# EAGLE board stm32f4-discovery-breakout-v2 (EAGLE 7.1.0)
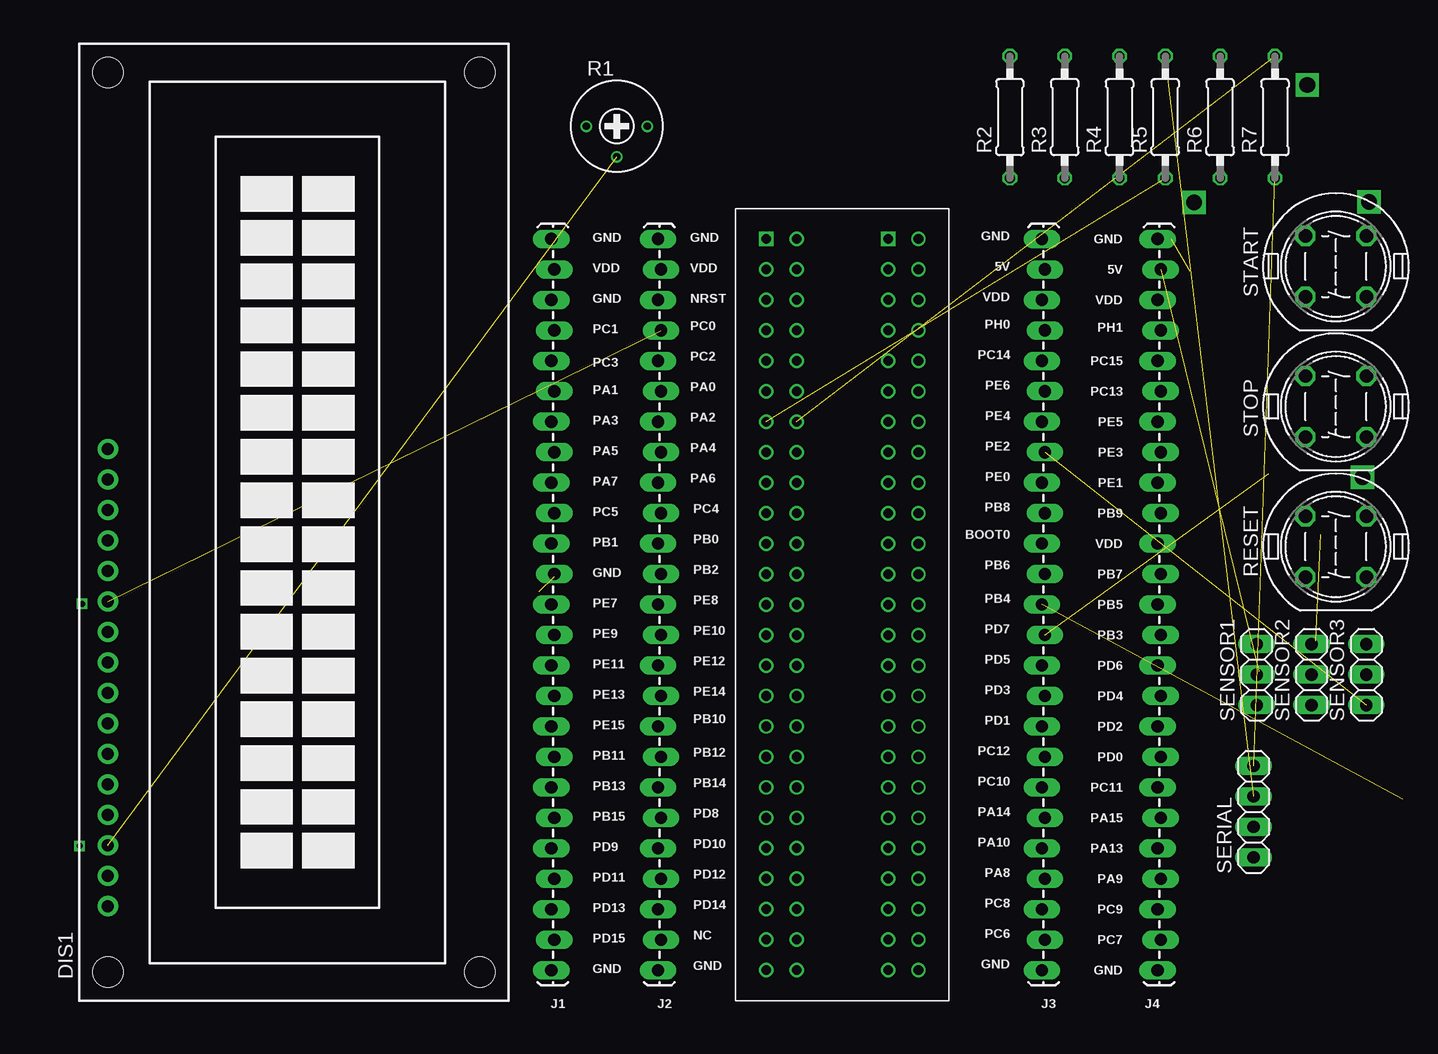
[diagram p0: board, top side]
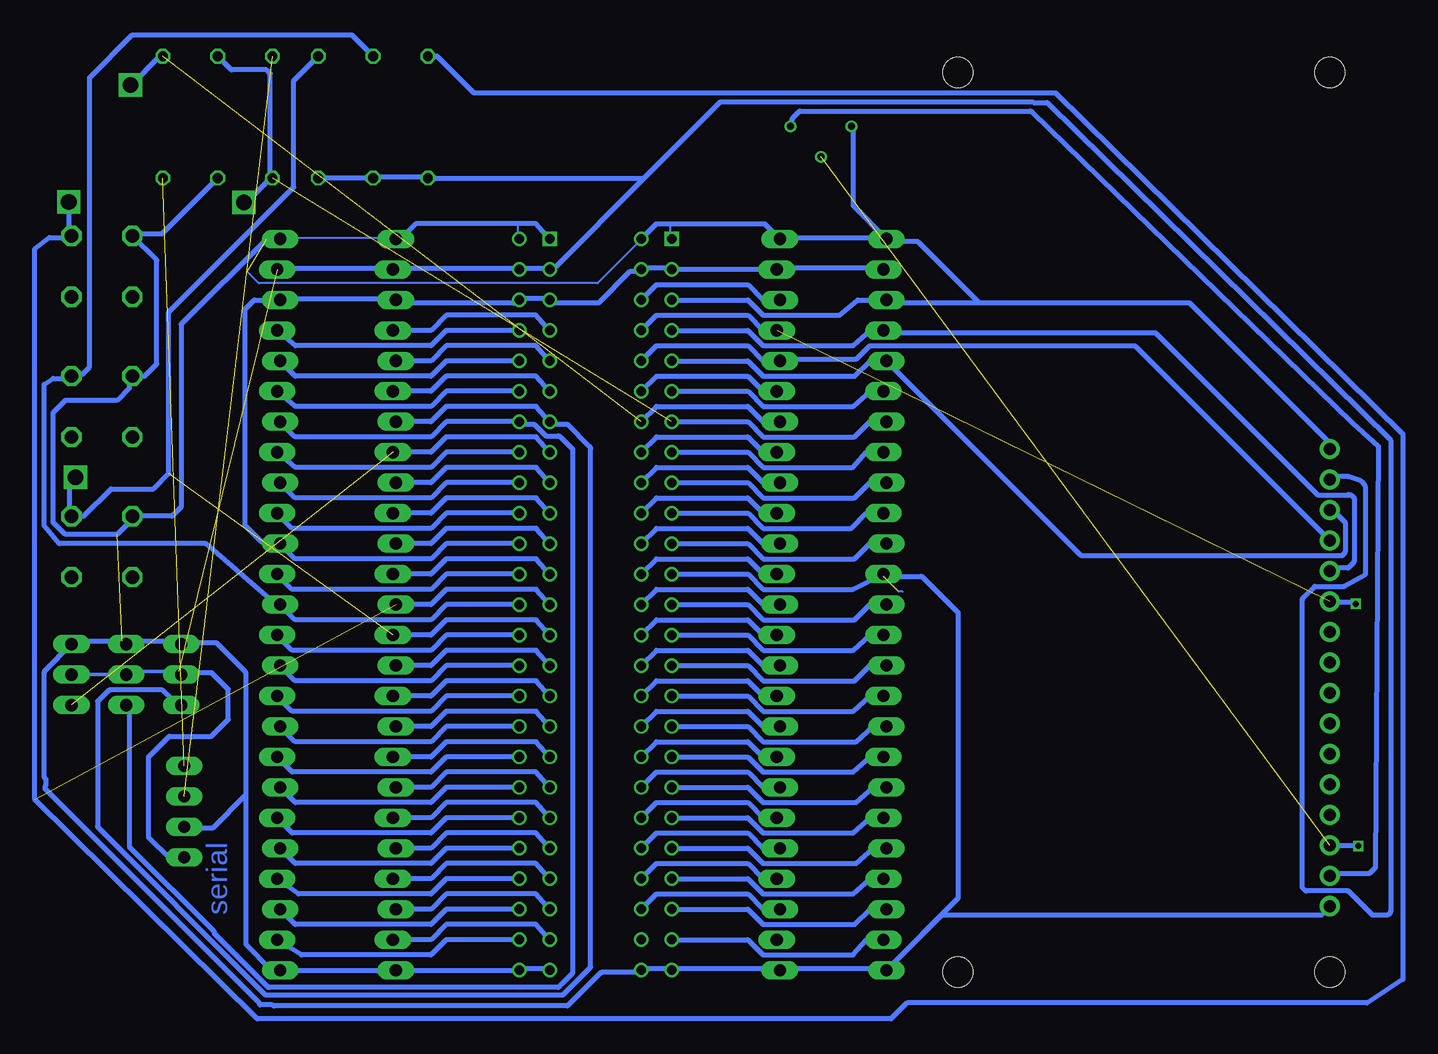
[diagram p1: board, bottom side, seen from below]

No outline drawn. Coordinates in mm, seen from the top.
Copper layers (1*16): Top 0.0356mm / dielectric 1.5011mm / Bottom 0.0356mm
Design rules "LaenPCBOrder": minimum track width 6mil, minimum drill 13mil, track to track 6mil, track to pad 6mil, pad to pad 6mil, via to via 6mil, smd to smd 6mil, copper to edge 15mil, drill to drill 6mil, minimum pad ring 7mil, minimum via ring 7mil, stop-mask expansion 3mil, vias tented up to drill 0mil, thermal gap 10mil

## Footprints (pad centres in the part's own frame; a part is rotated, then mirrored left to right if it is on the bottom)
TUXGR_16X2_R2 = drill 1 pad 1.676: 1 -32,15.5; 2 -29.46,15.5; 3 -26.92,15.5; 4 -24.38,15.5; 5 -21.84,15.5; 6 -19.3,15.5; 7 -16.76,15.5; 8 -14.22,15.5; 9 -11.68,15.5; 10 -9.14,15.5; 11 -6.6,15.5; 12 -4.06,15.5; 13 -1.52,15.5; 14 1.02,15.5; 15 3.56,15.5; 16 6.1,15.5 | hole 2.5: -37.5,-15.5; 37.5,-15.5; -37.5,15.5; 37.5,15.5
1X25_LOCK_LONGPADS = drill 1.016 long: 1 0,0.127; 2 2.54,-0.127; 3 5.08,0.127; 4 7.62,-0.127; 5 10.16,0.127; 6 12.7,-0.127; 7 15.24,0.127; 8 17.78,-0.127; 9 20.32,0.127; 10 22.86,-0.127; 11 25.4,0.127; 12 27.94,-0.127; 13 30.48,0.127; 14 33.02,-0.127; 15 35.56,0.127; 16 38.1,-0.127; 17 40.64,0.127; 18 43.18,-0.127; 19 45.72,0.127; 20 48.26,-0.127; 21 50.8,0.127; 22 53.34,-0.127; 23 55.88,0.127; 24 58.42,-0.127; 25 60.96,0.127
RTRIM3339P = drill 0.61: 1 -2.54,0; 2 0,-2.54; 3 2.54,0
0207/10 = drill 0.813 octagon: 1 -5.08,0; 2 5.08,0
DT6 = drill 1.118 octagon: 1 -2.54,2.54; 2 2.54,2.54; 3 2.54,-2.54; 4 -2.54,-2.54
1X03 = drill 1.016 long: 1 -2.54,0; 2 0,0; 3 2.54,0
1X04 = drill 1.016 long: 1 -3.81,0; 2 -1.27,0; 3 1.27,0; 4 3.81,0
STM32F4-DISCOVERY = drill 0.8 square: P$1 -27.94,30.48; P$51 -17.78,30.48 | drill 0.8: P$2 -25.4,30.48; P$3 -27.94,27.94; P$4 -25.4,27.94; P$5 -27.94,25.4; P$6 -25.4,25.4; P$7 -27.94,22.86; P$8 -25.4,22.86; P$9 -27.94,20.32; P$10 -25.4,20.32; P$11 -27.94,17.78; P$12 -25.4,17.78; P$13 -27.94,15.24; P$14 -25.4,15.24; P$15 -27.94,12.7; P$16 -25.4,12.7; P$17 -27.94,10.16; P$18 -25.4,10.16; P$19 -27.94,7.62; P$20 -25.4,7.62; P$21 -27.94,5.08; P$22 -25.4,5.08; P$23 -27.94,2.54; P$24 -25.4,2.54; P$25 -27.94,0; P$26 -25.4,0; P$27 -27.94,-2.54; P$28 -25.4,-2.54; P$29 -27.94,-5.08; P$30 -25.4,-5.08; P$31 -27.94,-7.62; P$32 -25.4,-7.62; P$33 -27.94,-10.16; P$34 -25.4,-10.16; P$35 -27.94,-12.7; P$36 -25.4,-12.7; P$37 -27.94,-15.24; P$38 -25.4,-15.24; P$39 -27.94,-17.78; P$40 -25.4,-17.78; P$41 -27.94,-20.32; P$42 -25.4,-20.32; P$43 -27.94,-22.86; P$44 -25.4,-22.86; P$45 -27.94,-25.4; P$46 -25.4,-25.4; P$47 -27.94,-27.94; P$48 -25.4,-27.94; P$49 -27.94,-30.48; P$50 -25.4,-30.48; P$52 -15.24,30.48; P$53 -17.78,27.94; P$54 -15.24,27.94; P$55 -17.78,25.4; P$56 -15.24,25.4; P$57 -17.78,22.86; P$58 -15.24,22.86; P$59 -17.78,20.32; P$60 -15.24,20.32; P$61 -17.78,17.78; P$62 -15.24,17.78; P$63 -17.78,15.24; P$64 -15.24,15.24; P$65 -17.78,12.7; P$66 -15.24,12.7; P$67 -17.78,10.16; P$68 -15.24,10.16; P$69 -17.78,7.62; P$70 -15.24,7.62; P$71 -17.78,5.08; P$72 -15.24,5.08; P$73 -17.78,2.54; P$74 -15.24,2.54; P$75 -17.78,0; P$76 -15.24,0; P$77 -17.78,-2.54; P$78 -15.24,-2.54; P$79 -17.78,-5.08; P$80 -15.24,-5.08; P$81 -17.78,-7.62; P$82 -15.24,-7.62; P$83 -17.78,-10.16; P$84 -15.24,-10.16; P$85 -17.78,-12.7; P$86 -15.24,-12.7; P$87 -17.78,-15.24; P$88 -15.24,-15.24; P$89 -17.78,-17.78; P$90 -15.24,-17.78; P$91 -17.78,-20.32; P$92 -15.24,-20.32; P$93 -17.78,-22.86; P$94 -15.24,-22.86; P$95 -17.78,-25.4; P$96 -15.24,-25.4; P$97 -17.78,-27.94; P$98 -15.24,-27.94; P$99 -17.78,-30.48; P$100 -15.24,-30.48

## Placement (x,y rotation side)
DIS1  TUXGR_16X2_R2  [TUXGR_16X2_R2]  -17.27,41.66 90 top
J1  [1X25_LOCK_LONGPADS]  4.32,4.32 90 top
J2  [1X25_LOCK_LONGPADS]  13.21,4.32 90 top
J3  [1X25_LOCK_LONGPADS]  45.21,4.32 90 top
J4  [1X25_LOCK_LONGPADS]  54.86,4.32 90 top
R1  [RTRIM3339P]  9.65,74.68 0 top
R2  [0207/10]  42.42,75.44 90 top
R3  [0207/10]  46.99,75.44 90 top
R4  [0207/10]  51.56,75.44 90 top
R5  [0207/10]  55.37,75.44 90 top
R6  [0207/10]  59.94,75.44 90 top
R7  [0207/10]  64.52,75.44 90 top
RESET  DT6  [DT6]  69.6,39.62 90 top
SENSOR1  [1X03]  62.99,28.96 90 top
SENSOR2  [1X03]  67.56,28.96 90 top
SENSOR3  [1X03]  72.14,28.96 90 top
SERIAL  [1X04]  62.74,17.53 90 top
START  DT6  [DT6]  69.6,62.99 90 top
STOP  DT6  [DT6]  69.6,51.31 90 top
U$1  STM32F4-DISCOVERY  [STM32F4-DISCOVERY]  50.04,34.8 0 top

## Library data of the parts
DIS1 = display-lcd; OC_FARNELL: unknown; OC_NEWARK: unknown
J1-J4 = SparkFun-Connectors
R1 = resistor
R2-R7 = rcl
RESET START STOP = switch-misc
SENSOR1-SENSOR3 SERIAL = pinhead
U$1 = STM32F4-DISCOVERY

## Nets
5V: DIS1.15 J3.24 J4.24 R2.1 R3.1 R4.1 SENSOR1.2 SENSOR2.2 SENSOR3.2 U$1.P$53 U$1.P$54
BOOT0: J3.15 U$1.P$71
GND: DIS1.1 DIS1.16 J1.1 J1.14 J1.23 J1.25 J2.1 J2.25 J3.1 J3.25 J4.1 J4.25 R1.1 R6.1 RESET.2 SENSOR1.3 SENSOR2.3 SENSOR3.3 START.2 STOP.2 U$1.P$1 U$1.P$2 U$1.P$5 U$1.P$23 U$1.P$49 U$1.P$50 U$1.P$51 U$1.P$52 U$1.P$99 U$1.P$100
N$1: DIS1.2 R1.3
N$2: DIS1.3 R1.2
N$3: SERIAL.1
N$4: SERIAL.2
N$5: R5.2 SERIAL.3
N$7: R7.1 SERIAL.4
NRST: J2.23 U$1.P$6
PA0: J2.20 U$1.P$12
PA1: J1.20 U$1.P$11
PA2: J2.19 R7.2 U$1.P$14
PA3: J1.19 R5.1 R6.2 U$1.P$13
PA4: J2.18 U$1.P$16
PA5: J1.18 U$1.P$15
PA6: J2.17 U$1.P$18
PA7: J1.17 U$1.P$17
PA8: J3.4 U$1.P$93
PA9: J4.4 U$1.P$94
PA10: J3.5 U$1.P$91
PA13: J4.5 U$1.P$92
PA14: J3.6 U$1.P$89
PA15: J4.6 U$1.P$90
PB0: J2.15 U$1.P$22
PB1: J1.15 U$1.P$21
PB2: J2.14 U$1.P$24
PB3: J4.12 U$1.P$78
PB4: J3.13 R2.2 START.3 U$1.P$75
PB5: J4.13 R3.2 STOP.3 U$1.P$76
PB6: J3.14 U$1.P$73
PB7: J4.14 U$1.P$74
PB8: J3.16 U$1.P$69
PB9: J4.16 U$1.P$70
PB10: J2.9 U$1.P$34
PB11: J1.8 U$1.P$35
PB12: J2.8 U$1.P$36
PB13: J1.7 U$1.P$37
PB14: J2.7 U$1.P$38
PB15: J1.6 U$1.P$39
PC0: DIS1.11 J2.22 U$1.P$8
PC1: DIS1.12 J1.22 U$1.P$7
PC2: DIS1.13 J2.21 U$1.P$10
PC3: DIS1.14 J1.21 U$1.P$9
PC4: J2.16 U$1.P$20
PC5: J1.16 U$1.P$19
PC6: J3.2 U$1.P$97
PC7: J4.2 U$1.P$98
PC8: J3.3 U$1.P$95
PC9: J4.3 U$1.P$96
PC10: J3.7 U$1.P$87
PC11: J4.7 U$1.P$88
PC12: J3.8 U$1.P$85
PC13: J4.20 U$1.P$62
PC14: J3.21 U$1.P$59
PC15: J4.21 U$1.P$60
PD0: J4.8 U$1.P$86
PD1: J3.9 U$1.P$83
PD2: J4.9 U$1.P$84
PD3: J3.10 U$1.P$81
PD4: J4.10 U$1.P$82
PD5: J3.11 U$1.P$79
PD6: J4.11 U$1.P$80
PD7: J3.12 R4.2 RESET.3 U$1.P$77
PD8: J2.6 U$1.P$40
PD9: J1.5 U$1.P$41
PD10: J2.5 U$1.P$42
PD11: J1.4 U$1.P$43
PD12: J2.4 U$1.P$44
PD13: J1.3 U$1.P$45
PD14: J2.3 U$1.P$46
PD15: J1.2 U$1.P$47
PE0: J3.17 U$1.P$67
PE1: J4.17 U$1.P$68
PE2: J3.18 SENSOR3.1 U$1.P$65
PE3: J4.18 U$1.P$66
PE4: J3.19 SENSOR1.1 U$1.P$63
PE5: J4.19 SENSOR2.1 U$1.P$64
PE6: J3.20 U$1.P$61
PE7: J1.13 U$1.P$25
PE8: J2.13 U$1.P$26
PE9: J1.12 U$1.P$27
PE10: J2.12 U$1.P$28
PE11: J1.11 U$1.P$29
PE12: J2.11 U$1.P$30
PE13: J1.10 U$1.P$31
PE14: J2.10 U$1.P$32
PE15: J1.9 U$1.P$33
PH0: J3.22 U$1.P$57
PH1: J4.22 U$1.P$58
VDD: J1.24 J2.24 J3.23 J4.15 J4.23 U$1.P$3 U$1.P$4 U$1.P$55 U$1.P$56 U$1.P$72

## Tracks (layer width: path | path; a pad name or v marks a point on that pad's centre or on a via)
5V  (1 unrouted)
  Bottom 0.152: 63.18,29.21 SENSOR1.2 | 67.31,29.21 SENSOR2.2 | 51.44,70.48 R4.1 | 46.99,70.48 R3.1 | 34.61,62.87 U$1.P$54 | 45.4,62.87 J3.24 45.09,62.87 | 54.93,62.87 J4.24 | 32.07,62.87 U$1.P$53
  Bottom 0.305: 63.18,29.21 67.56,29.21 SENSOR2.2 SENSOR3.2
  Bottom 0.406: 46.99,70.48 42.55,70.48 R2.1 24.38,70.36 | R3.1 R4.1 | 54.93,62.87 45.47,62.87 | 45.47,62.87 J3.24 | 45.47,62.87 34.92,62.87 U$1.P$54 | 34.61,62.87 32.38,62.87 U$1.P$53 | 32.07,62.87 31.88,62.87 24.38,70.36 | 24.38,70.36 18.03,76.71 -8,76.71 -8.06,76.64 -9.21,76.64 -37.85,48.51 -37.85,9.25 arc45 -37.77,9.07 -37.59,8.89 -36.43,8.89 arc45 -36.25,8.96 -34.29,10.92 -30.84,10.92 arc45 -30.66,11 -30.48,11.18 -30.48,35.2 arc45 -30.55,35.38 -31.5,36.32 -33.93,36.32 arc-45 -34.11,36.4 -35.74,37.31 -35.74,44.57 arc-45 -35.32,45.12 -34.29,45.47 -33.13,45.47 arc-45 -32.95,45.39 DIS1.15
BOOT0
  Bottom 0.406: U$1.P$71 33.4,41.15 40.89,41.15 42.16,39.88 J3.15
GND  (3 unrouted)
  Bottom 0.152: 63.18,31.75 SENSOR1.3 62.87,31.43 | 67.31,31.75 SENSOR2.3 67.63,31.75 | 72.07,31.75 SENSOR3.3 | 32.38,4.45 U$1.P$99 | 34.61,4.45 U$1.P$100 34.92,4.45 | 54.61,4.45 J4.1 54.93,4.45 | 45.09,4.45 J3.1 | 22.23,4.45 U$1.P$49 21.91,4.45 | 4.45,4.45 J1.1 4.13,4.45 | 13.02,4.45 J2.1 13.34,4.45 | -32.07,8.89 -32.7,9.53 DIS1.1 | 2.86,35.88 3.17,35.88 | 4.45,37.15 J1.14 | 24.77,4.13 U$1.P$50 | 34.92,66.55 34.92,65.41 U$1.P$52 | J3.25 45.09,65.41 54.61,65.41 J4.25 | 60.01,70.17 R6.1 | 66.99,65.72 START.2 | 67.31,53.66 STOP.2 | 66.99,42.23 RESET.2 | 22.23,66.55 22.23,65.41 U$1.P$1 | 6.99,74.61 R1.1 | 4.45,65.41 J1.25 4.13,65.09 | 13.02,65.41 J2.25 | -32.7,47.94 DIS1.16 | 4.13,60.01 J1.23 | 57.47,62.55 56.52,61.59 28.26,61.59 24.77,65.09 U$1.P$2
  Bottom 0.406: U$1.P$2 23.37,66.55 22.23,66.55 14.35,66.55 J2.25 | U$1.P$23 15.75,37.34 14.48,36.07 6.99,36.07 J1.14 | U$1.P$51 33.4,66.55 34.92,66.55 43.43,66.55 44.7,65.28 J3.25 | U$1.P$5 15.75,60.2 14.48,58.93 8.13,58.93 6.6,60.2 J1.23 4.01,60.02 arc-45 3.83,59.94 -3.56,59.94 | 67.31,53.66 67.31,52.83 68.33,51.82 72.64,51.82 73.66,50.8 73.66,41.66 72.64,40.64 68.33,40.64 67.06,41.91 RESET.2 63.75,42.16 62.99,42.93 62.99,58.17 55.88,65.28 J4.25 | STOP.2 66.04,53.85 65.02,54.86 65.02,63.5 START.2 | 66.99,65.72 64.58,65.72 R6.1 | -32.7,47.94 -32.7,48.22 arc-45 -32.63,48.4 -21.08,59.94 -3.56,59.94 | 4.13,65.09 1.69,65.09 arc45 1.51,65.01 -3.56,59.94 | 13.02,65.41 4.04,65.41 arc45 3.86,65.33 3.81,65.28 J1.25 6.91,68 arc45 6.99,68.18 6.99,74.61 | -32.07,8.89 -0.49,8.89 arc-45 -0.31,8.82 J1.1 -1.7,10.21 arc-45 -1.77,10.38 -1.77,34.16 1.15,37.07 arc-45 1.32,37.15 4.45,37.15 | 4.45,4.45 12.85,4.45 arc-45 13.03,4.37 J2.1 | 13.34,4.45 21.87,4.45 arc-45 22.05,4.37 U$1.P$49 | 22.23,4.45 24.41,4.45 arc-45 24.59,4.37 U$1.P$50 | 24.77,4.13 27.89,4.13 arc-45 28.07,4.05 30.78,1.34 55.21,1.34 arc45 55.39,1.42 56.44,1.42 56.44,1.44 arc-45 56.52,1.62 74.33,19.43 74.33,19.59 arc45 74.25,19.76 74.25,20.13 arc-45 74.33,20.31 74.4,20.38 74.4,29.13 arc45 74.32,29.31 SENSOR3.3 | 72.07,31.75 67.92,31.75 | 67.92,31.75 arc45 67.74,31.68 SENSOR2.3 | 67.92,31.75 63.35,31.75 arc45 63.17,31.68 SENSOR1.3 62.97,31.52 arc45 62.79,31.59 60.05,31.59 57.66,29.21 arc45 57.59,29.03 57.59,6.47 55.51,4.39 arc-45 55.33,4.32 J4.1 J3.1 U$1.P$100 34.74,4.37 arc45 34.57,4.45 32.38,4.45
N$1
  Bottom 0.152: 12.06,74.93 R1.3
  Bottom 0.406: 12.06,74.93 12.06,75.21 arc45 11.99,75.39 11.43,75.95 -7.77,75.95 arc45 -7.95,75.87 -34.67,49.91 -36.83,48.01 -36.58,12.87 -36.16,12.46 arc45 -35.98,12.38 -33.06,12.38 arc-45 -32.88,12.31 DIS1.2
N$2  (1 unrouted)
N$5  (1 unrouted)
N$7  (1 unrouted)
NRST
  Bottom 0.406: U$1.P$6 23.37,61.47 15.75,61.47 14.48,60.2 J2.23
PA0
  Bottom 0.406: U$1.P$12 23.37,53.85 15.75,53.85 14.48,52.58 J2.20 13.21,52.58
PA1
  Bottom 0.406: U$1.P$11 15.75,52.58 14.48,51.31 6.99,51.31 5.84,52.32 5.59,52.58 J1.20
PA2  (1 unrouted)
  Bottom 0.406: U$1.P$14 23.37,51.31 15.75,51.31 14.48,50.04 J2.19 | R7.2 64.77,80.52 67.21,78.08
PA3  (1 unrouted)
  Bottom 0.152: 55.88,79.38 55.56,79.38 | 55.56,70.48 R5.1 | 59.69,80.33 R6.2
  Bottom 0.406: U$1.P$13 15.75,50.04 14.48,48.77 6.86,48.77 5.59,50.04 J1.19 | 55.56,70.48 55.56,79.06 55.88,79.38 58.8,79.38 R6.2 | R5.1 55.51,70.36 57.62,68.25
PA4
  Bottom 0.406: U$1.P$16 23.37,48.77 15.75,48.77 14.48,47.5 J2.18 13.21,47.5
PA5
  Bottom 0.406: U$1.P$15 15.75,47.5 14.48,46.23 6.99,46.23 5.84,47.5 J1.18
PA6
  Bottom 0.406: U$1.P$18 23.37,46.23 15.75,46.23 14.48,44.96 J2.17
PA7
  Bottom 0.406: U$1.P$17 15.75,44.96 14.48,43.69 6.86,43.69 5.59,44.96 J1.17
PA8
  Bottom 0.406: U$1.P$93 33.4,13.21 40.89,13.21 42.16,11.94 J3.4
PA9
  Bottom 0.406: U$1.P$94 40.89,11.94 42.16,10.67 53.21,10.67 J4.4
PA10
  Bottom 0.406: U$1.P$91 33.4,15.75 40.89,15.75 42.16,14.48 J3.5
PA13
  Bottom 0.406: U$1.P$92 40.89,14.48 42.16,13.21 53.47,13.21 J4.5
PA14
  Bottom 0.406: U$1.P$89 33.4,18.29 40.89,18.29 42.16,17.02 J3.6
PA15
  Bottom 0.406: U$1.P$90 40.89,17.02 42.16,15.75 53.72,15.75 J4.6
PB0
  Bottom 0.406: U$1.P$22 23.37,41.15 15.75,41.15 14.48,39.88 J2.15
PB1
  Bottom 0.406: U$1.P$21 15.75,39.88 14.48,38.61 6.86,38.61 5.59,39.88 J1.15
PB2
  Bottom 0.406: U$1.P$24 23.37,38.61 15.75,38.61 14.48,37.34 J2.14
PB3
  Bottom 0.406: U$1.P$78 40.89,32.26 42.16,30.99 53.72,30.99 J4.12
PB4  (1 unrouted)
  Bottom 0.406: U$1.P$75 33.4,36.07 40.89,36.07 42.16,34.8 J3.13 | R2.2 41.66,80.52 38.61,77.47 -9.91,77.47 -38.86,49.02 -38.86,3.56 -35.88,1.59 2.48,1.59 3.81,0.25 56.64,0.25 75.18,18.54 75.18,64.45 73.98,65.41 72.26,65.41 START.3
PB5
  Bottom 0.152: 72.07,53.98 STOP.3 72.39,53.66 | 54.93,34.92 J4.13
  Bottom 0.406: U$1.P$76 40.89,34.8 42.16,33.53 53.47,33.53 J4.13 | 54.93,34.92 55.24,34.92 60.96,39.88 73.15,39.88 74.42,41.4 74.42,53.15 73.66,53.66 72.33,53.66 STOP.3 | 72.07,53.98 71.25,53.98 70.61,54.61 70.61,78.74 67.06,82.3 48.77,82.3 R3.2
PB6
  Bottom 0.406: U$1.P$73 33.4,38.61 40.89,38.61 42.16,37.34 J3.14
PB7
  Bottom 0.406: U$1.P$74 40.89,37.34 42.16,36.07 53.72,36.07 J4.14
PB8
  Bottom 0.406: U$1.P$69 33.4,43.69 40.89,43.69 42.16,42.42 J3.16
PB9
  Bottom 0.406: U$1.P$70 40.89,42.42 42.16,41.15 53.72,41.15 J4.16
PB10
  Bottom 0.406: U$1.P$34 23.37,25.91 15.75,25.91 14.48,24.64 J2.9
PB11
  Bottom 0.406: U$1.P$35 15.75,22.1 14.48,20.83 6.99,20.83 5.59,22.1 J1.8
PB12
  Bottom 0.406: U$1.P$36 23.37,23.37 15.75,23.37 14.48,22.1 J2.8
PB13
  Bottom 0.406: U$1.P$37 15.75,19.56 14.48,18.29 6.73,18.29 5.33,19.56 J1.7
PB14
  Bottom 0.406: U$1.P$38 23.37,20.83 15.75,20.83 14.48,19.56 J2.7
PB15
  Bottom 0.406: U$1.P$39 15.75,17.02 14.48,15.75 6.99,15.75 5.59,17.02 J1.6
PC0  (1 unrouted)
  Bottom 0.406: U$1.P$8 23.37,58.93 15.75,58.93 14.48,57.66 J2.22
PC1
  Bottom 0.152: -34.29,44.13 -34.29,43.94 | 4.45,57.47 J1.22
  Bottom 0.406: U$1.P$7 15.75,57.66 14.48,56.39 6.99,56.39 5.84,57.4 5.59,57.66 J1.22 | 4.45,57.47 -18.12,57.47 arc45 -18.3,57.39 -31.75,43.94 -34.29,43.94 -34.44,43.94 arc45 -34.62,43.87 -34.8,43.69 -34.8,38.46 arc45 -34.72,38.28 -34.29,37.85 -33.13,37.85 arc-45 -32.95,37.77 DIS1.12
PC2
  Bottom 0.152: -32.7,40.32 DIS1.13 | 13.02,55.24 J2.21
  Bottom 0.406: U$1.P$10 23.37,56.39 15.75,56.39 14.48,55.12 J2.21 | 13.02,55.24 6.84,55.24 arc-45 6.66,55.32 5.59,56.39 -16.41,56.39 arc45 -16.59,56.31 DIS1.13
PC3
  Bottom 0.152: 4.13,54.93 J1.21
  Bottom 0.406: U$1.P$9 15.75,55.12 14.48,53.85 6.86,53.85 5.59,55.12 J1.21 -11.99,38.94 arc-45 -12.17,38.86 -33.78,38.86 -33.96,39.04 arc-45 -34.04,39.22 -34.04,41.66 -33.09,42.6 arc-45 -32.91,42.68 DIS1.14
PC4
  Bottom 0.406: U$1.P$20 23.37,43.69 15.75,43.69 14.48,42.42 J2.16
PC5
  Bottom 0.406: U$1.P$19 15.75,42.42 14.48,41.15 7.11,41.15 5.84,42.42 J1.16
PC6
  Bottom 0.406: U$1.P$97 33.4,8.13 40.89,8.13 42.16,6.86 J3.2
PC7
  Bottom 0.406: U$1.P$98 40.89,6.86 42.16,5.59 52.96,5.59 J4.2
PC8
  Bottom 0.406: U$1.P$95 33.4,10.67 40.89,10.67 42.16,9.4 J3.3
PC9
  Bottom 0.406: U$1.P$96 40.89,9.4 42.16,8.13 53.47,8.13 J4.3
PC10
  Bottom 0.406: U$1.P$87 33.4,20.83 40.89,20.83 42.16,19.56 J3.7 45.97,19.56
PC11
  Bottom 0.406: U$1.P$88 40.89,19.56 42.16,18.29 53.47,18.29 J4.7
PC12
  Bottom 0.406: U$1.P$85 33.4,23.37 40.89,23.37 42.16,22.1 J3.8
PC13
  Bottom 0.406: U$1.P$62 40.89,52.58 42.16,51.31 53.47,51.31 J4.20
PC14
  Bottom 0.406: U$1.P$59 33.4,56.39 40.89,56.39 42.16,55.12 J3.21
PC15
  Bottom 0.406: U$1.P$60 40.89,55.12 42.16,53.85 53.47,53.85 J4.21
PD0
  Bottom 0.406: U$1.P$86 40.89,22.1 42.16,20.83 53.72,20.83 J4.8
PD1
  Bottom 0.406: U$1.P$83 33.4,25.91 40.89,25.91 42.16,24.64 J3.9
PD2
  Bottom 0.406: U$1.P$84 40.89,24.64 42.16,23.37 53.47,23.37 J4.9
PD3
  Bottom 0.406: U$1.P$81 33.4,28.45 40.89,28.45 42.16,27.18 J3.10
PD4
  Bottom 0.406: U$1.P$82 40.89,27.18 42.16,25.91 53.72,25.91 J4.10
PD5
  Bottom 0.406: U$1.P$79 33.4,30.99 40.89,30.99 42.16,29.72 J3.11
PD6
  Bottom 0.406: U$1.P$80 40.89,29.72 42.16,28.45 53.47,28.45 J4.11
PD7  (1 unrouted)
  Bottom 0.152: 51.75,80.33 R4.2
  Bottom 0.406: U$1.P$77 33.4,33.53 40.89,33.53 42.16,32.26 J3.12 | RESET.3 71.12,42.16 68.83,44.45 65.28,44.45 64.01,45.72 64.01,59.18 53.59,69.6 53.59,78.49 R4.2
PD8
  Bottom 0.406: U$1.P$40 23.37,18.29 15.75,18.29 14.48,17.02 J2.6
PD9
  Bottom 0.406: U$1.P$41 15.75,14.48 14.48,13.21 6.73,13.21 5.33,14.48 J1.5
PD10
  Bottom 0.406: U$1.P$42 23.37,15.75 15.75,15.75 14.48,14.48 J2.5
PD11
  Bottom 0.406: U$1.P$43 15.75,11.94 14.48,10.67 6.99,10.67 5.59,11.94 J1.4
PD12
  Bottom 0.406: U$1.P$44 23.37,13.21 15.75,13.21 14.48,11.94 J2.4
PD13
  Bottom 0.406: U$1.P$45 15.75,9.4 14.48,8.13 6.86,8.13 5.59,9.4 J1.3
PD14
  Bottom 0.406: U$1.P$46 23.37,10.67 15.75,10.67 14.48,9.4 J2.3
PD15
  Bottom 0.406: U$1.P$47 15.75,6.86 14.48,5.59 6.99,5.59 5.84,6.86 J1.2
PE0
  Bottom 0.406: U$1.P$67 33.4,46.23 40.89,46.23 42.16,44.96 J3.17
PE1
  Bottom 0.406: U$1.P$68 40.89,44.96 42.16,43.69 53.47,43.69 J4.17
PE2  (1 unrouted)
  Bottom 0.406: U$1.P$65 33.4,48.77 40.89,48.77 42.16,47.5 J3.18
PE3
  Bottom 0.406: U$1.P$66 40.89,47.5 42.16,46.23 53.47,46.23 J4.18
PE4
  Bottom 0.152: 63.18,26.67 SENSOR1.1 | 32.07,49.85 U$1.P$63
  Bottom 0.406: U$1.P$63 33.4,51.31 40.89,51.31 42.16,50.04 J3.19 | 63.18,26.67 63.44,26.67 arc45 63.62,26.74 64.55,27.67 68.91,27.67 arc-45 69.09,27.6 69.95,26.74 69.95,16.34 arc-45 69.88,16.16 63.42,9.71 arc-45 63.42,9.7 55.97,2.25 31.28,2.25 arc-45 31.1,2.32 28.86,4.56 28.86,47.8 arc-45 28.93,47.98 30.8,49.85 32.07,49.85
PE5
  Bottom 0.152: 67.31,26.35 SENSOR2.1 | 34.61,49.85 U$1.P$64
  Bottom 0.406: U$1.P$64 40.89,50.04 42.16,48.77 53.47,48.77 J4.19 | 34.61,49.85 33.68,49.85 arc45 33.5,49.77 32.58,48.85 31.55,48.85 arc45 31.37,48.78 30.35,47.75 30.35,4.2 arc45 30.42,4.02 30.91,3.53 arc45 30.92,3.52 31.29,3.15 arc45 31.3,3.12 31.54,2.88 55.65,2.88 arc45 55.83,2.96 60.21,7.34 60.21,7.4 arc-45 60.29,7.58 67.31,14.61 67.31,26.35
PE6
  Bottom 0.406: U$1.P$61 33.4,53.85 40.89,53.85 42.16,52.58 J3.20
PE7
  Bottom 0.406: U$1.P$25 15.75,34.8 14.48,33.53 6.86,33.53 5.59,34.8 J1.13
PE8
  Bottom 0.406: U$1.P$26 23.37,36.07 15.75,36.07 14.48,34.8 J2.13
PE9
  Bottom 0.406: U$1.P$27 15.75,32.26 14.48,30.99 6.99,30.99 5.59,32.26 J1.12
PE10
  Bottom 0.406: U$1.P$28 23.37,33.53 15.75,33.53 14.48,32.26 J2.12
PE11
  Bottom 0.406: U$1.P$29 15.75,29.72 14.48,28.45 6.86,28.45 5.59,29.72 J1.11
PE12
  Bottom 0.406: U$1.P$30 23.37,30.99 15.75,30.99 14.48,29.72 J2.11
PE13
  Bottom 0.406: U$1.P$31 15.75,27.18 14.48,25.91 6.99,25.91 5.59,27.18 J1.10
PE14
  Bottom 0.406: U$1.P$32 23.37,28.45 15.75,28.45 14.48,27.18 J2.10
PE15
  Bottom 0.406: U$1.P$33 15.75,24.64 14.48,23.37 6.73,23.37 5.33,24.64 J1.9
PH0
  Bottom 0.406: U$1.P$57 33.4,58.93 40.89,58.93 42.16,57.66 J3.22
PH1
  Bottom 0.406: U$1.P$58 40.89,57.66 42.16,56.39 53.47,56.39 J4.22
S$1
  Bottom 0.406: 62.74,16.18 60.33,16.18 57.6,18.92
S$2
  Bottom 0.406: 62.86,13.58 63.92,13.58 65.7,15.36 65.7,22.1 63.98,23.82 60.47,23.82 59.06,25.22 59.06,27.74 60.44,29.12 62.84,29.12 62.96,29
S$3  (via drill 1.3 pad 1.27)
  other vias: 67.21,78.11
S$4  (via drill 1.3 pad 1.27)
  other vias: 57.76,68.31
S$5  (via drill 1.3 pad 1.27)
  other vias: 72.36,68.36
S$6
  Bottom 0.406: 72.32,65.55 72.32,68.28 72.4,68.36
S$7  (via drill 1.3 pad 1.27)
  other vias: 71.81,45.4
S$8
  Bottom 0.406: 72.27,42.2 72.27,44.9 71.88,45.3
S$9  (via drill 0.5 pad 0.25)
  other vias: -35.13,14.66
S$10
  Bottom 0.406: -32.73,14.73 -35.13,14.73 -35.16,14.71
S$11  (via drill 0.5 pad 0.25)
  other vias: -34.93,34.86
S$12
  Bottom 0.406: -32.65,35 -34.71,35 -34.85,34.86
VDD
  Bottom 0.152: 4.45,62.87 J1.24 | 22.23,62.87 U$1.P$3 21.91,62.87 | 24.45,62.87 U$1.P$4 24.77,62.55 | 32.38,60.33 U$1.P$55 32.07,60.33 | 34.61,60.33 U$1.P$56 34.92,60.33 | 54.61,60.33 J4.23 54.93,60.01 | 45.09,60.33 J3.23 | 13.34,62.87 J2.24 | 54.93,40.01 J4.15
  Bottom 0.406: U$1.P$72 40.89,39.88 42.16,38.61 53.47,38.61 J4.15 | 54.93,40.01 56.26,40.01 57.66,41.4 57.66,59.44 56.9,60.2 J4.23 | 54.61,60.33 45.21,60.33 J3.23 44.83,59.94 35.31,59.94 | 4.45,62.87 13.21,62.87 J2.24 U$1.P$3 | 22.23,62.87 24.51,62.87 U$1.P$4 | 24.77,62.55 25.59,62.55 28.19,59.94 32,59.94 U$1.P$55 | 32.38,60.33 34.92,60.33 35.31,59.94 | 35.31,59.94 35.05,59.94 U$1.P$56

## Text on the board
Bottom: serial
tNames: GND | GND | GND | GND | 5V | 5V | VDD | VDD | GND | NRST | VDD | VDD | PC0 | PH0 | PH1 | PC1 | PC14 | PC3 | PC2 | PC15 | PA0 | PE6 | PC13 | PA1 | PE4 | PA3 | PA2 | PE5 | PE2 | PA5 | PA4 | PE3 | PA7 | PA6 | PE0 | PE1 | PB8 | PC5 | PC4 | PB9 | BOOT0 | PB1 | PB0 | VDD | PB6 | GND | PB2 | PB7 | PE7 | PE8 | PB4 | PB5 | PD7 | PE9 | PE10 | PB3 | PE12 | PD5 | PD6 | PE11 | PD3 | PE13 | PE14 | PD4 | PB10 | PD1 | PD2 | PE15 | PC12 | PB11 | PB12 | PD0 | PB14 | PC10 | PC11 | PB13 | PA14 | PB15 | PD8 | PA15 | PA10 | PD9 | PD10 | PA13 | PD11 | PD12 | PA8 | PA9 | PC8 | PD13 | PD14 | PC9 | PD15 | NC | PC6 | PC7 | GND | GND | GND | GND